# Altium PCB PetWaterDispenser.PcbDoc
Units mm, origin at the board's own origin, x right, y up, seen from the top; angles counter-clockwise.
Board outline 66 x 26 mm, 2 copper layers (Top Layer, Bottom Layer); 20 components, 10 nets, 50 pads, 0 vias.
Unrouted connection lines stored in the file: 1.
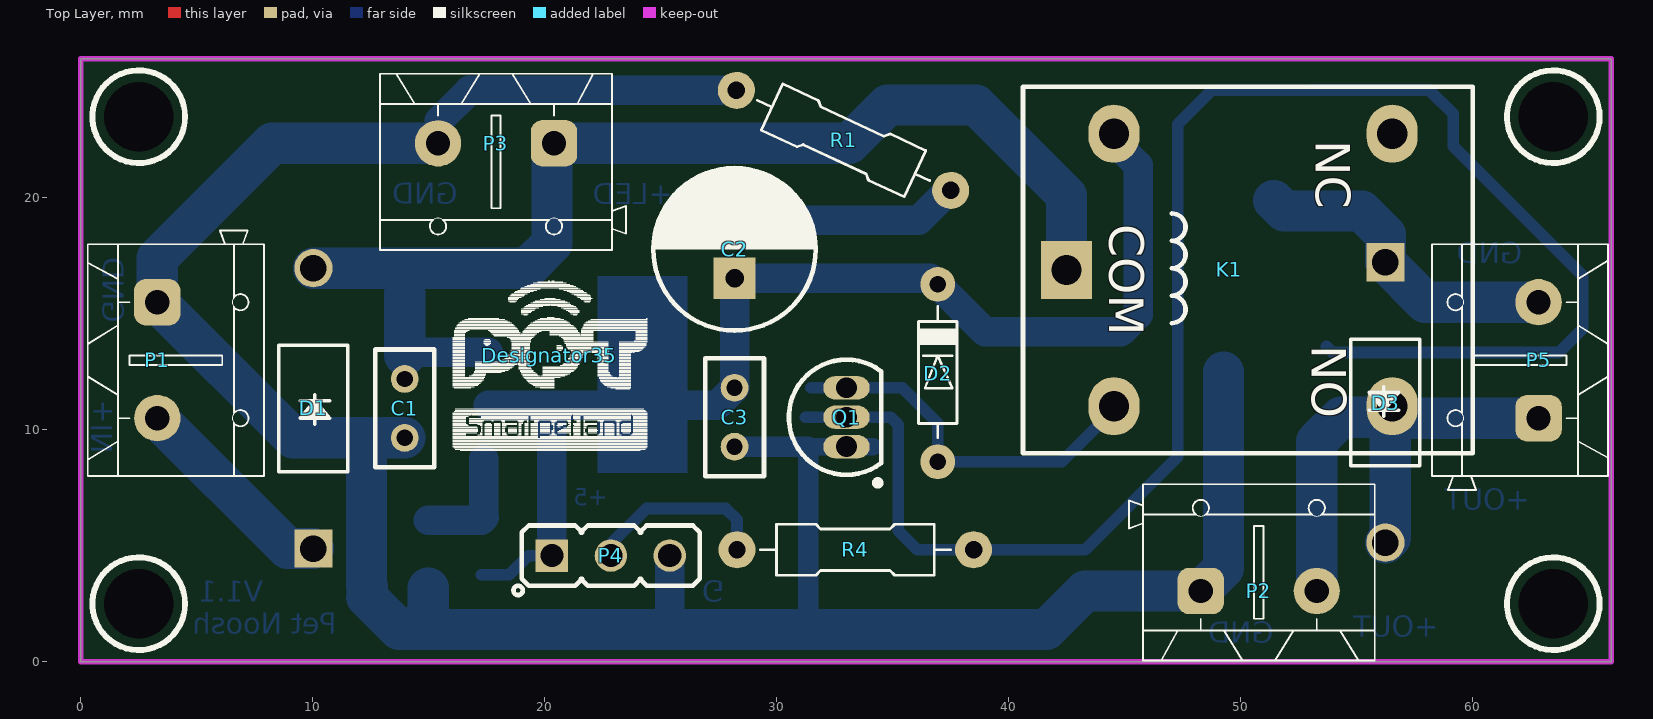
[diagram p0: Top Layer view]
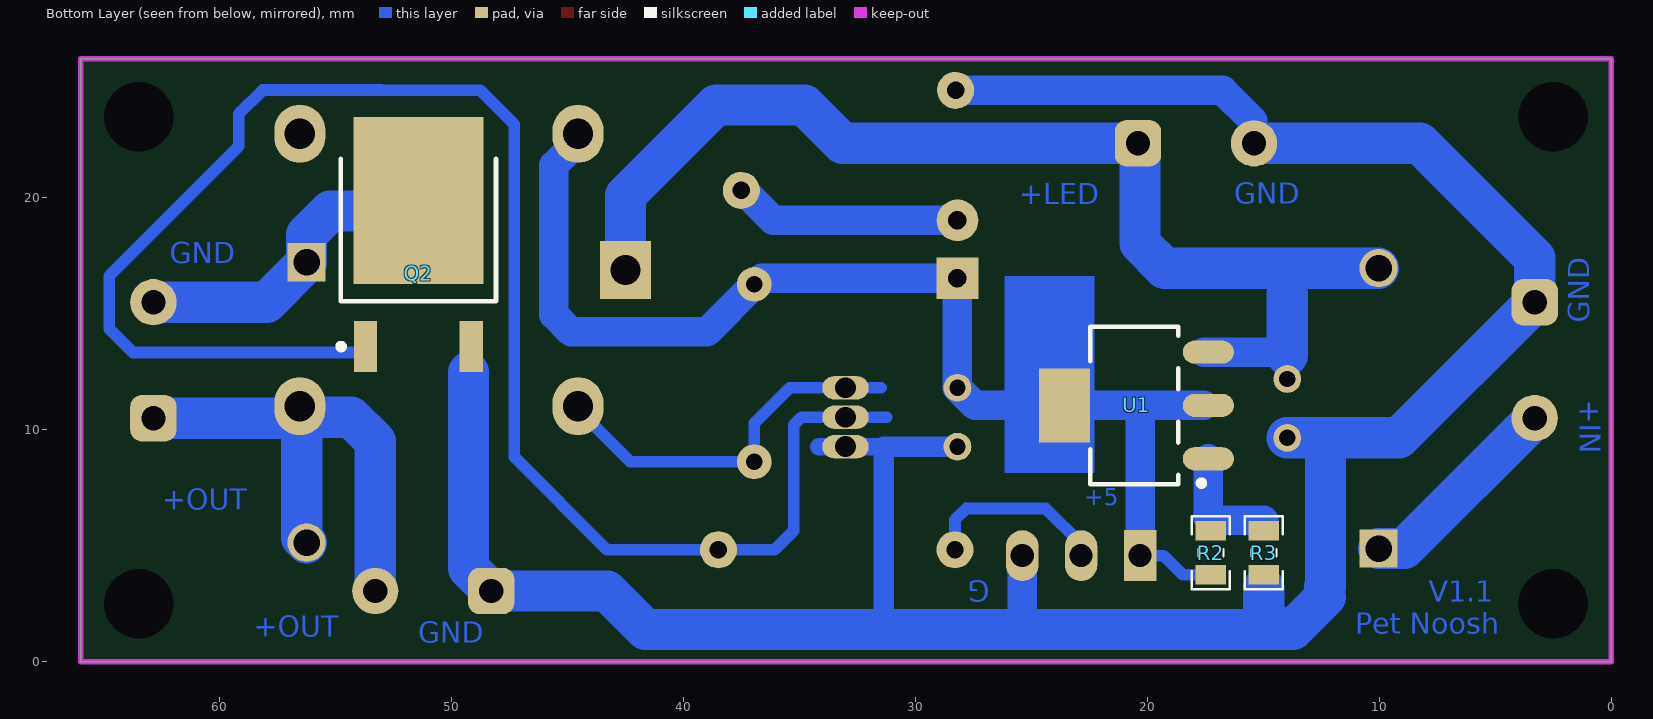
[diagram p1: Bottom Layer view, seen from below]
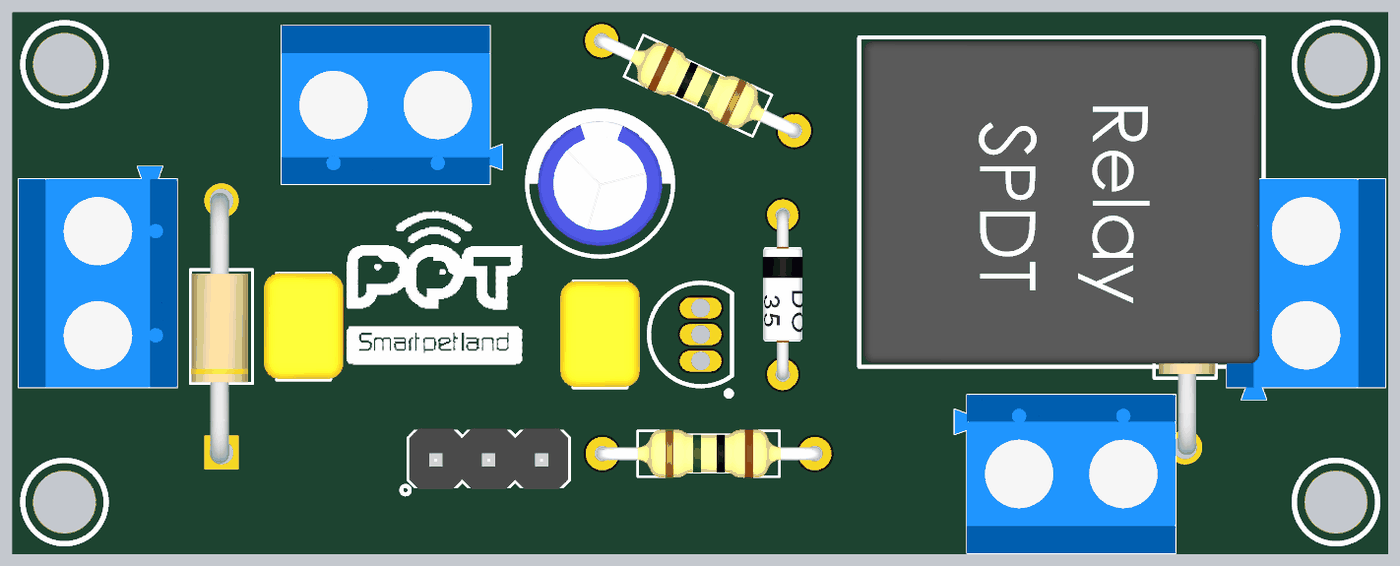
[diagram p2: 3D render of the assembled board from above, using the file's embedded part models]
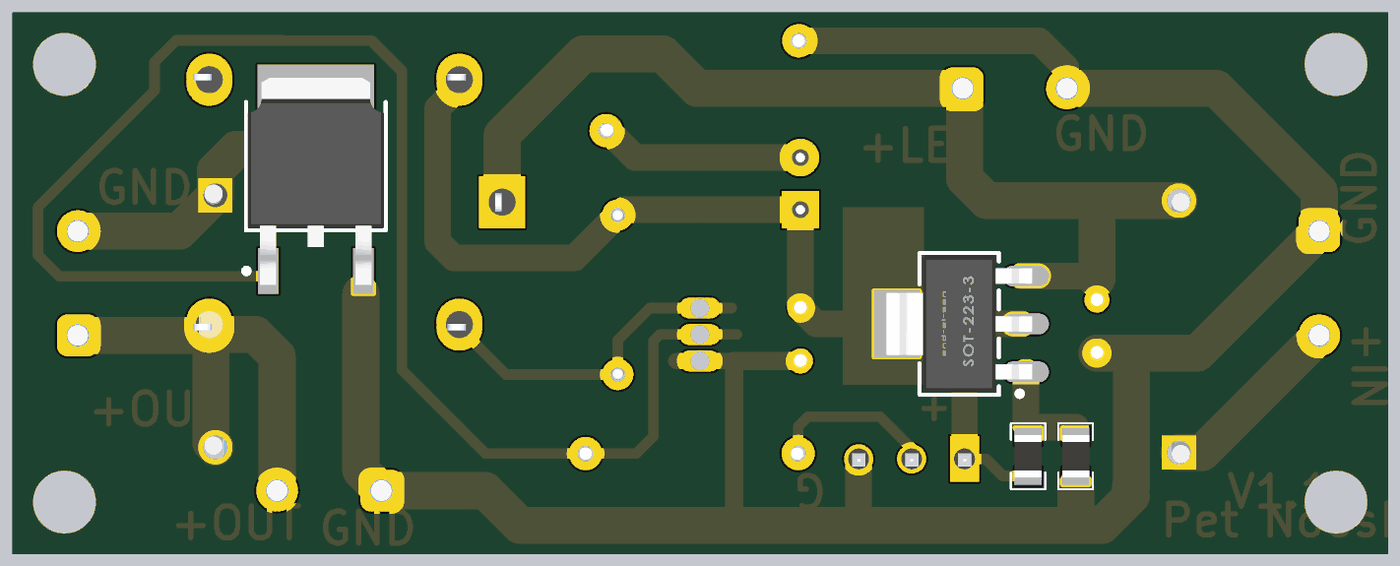
[diagram p3: 3D render of the assembled board from below, using the file's embedded part models]

## Layer stack, top to bottom
Top Solder: solder mask 0.0102, Solder Resist, Dk 3.5
Top Layer: signal copper 0.0356
Dielectric 1: dielectric 0.32, FR-4, Dk 4.8
Bottom Layer: signal copper 0.0356
Bottom Solder: solder mask 0.0102, Solder Resist, Dk 3.5

## Board outline
0,0 0,26 66,26 66,0

## Design rules (kind name [scope] priority, off if disabled: settings)
Clearance [All] p1: gap=0.381 ignorepadtopadclearanceinfootprint=TRUE
ComponentClearance [All] p1: gap=0 collisioncheckmode=3 verticalgap=0.254 showdistances=FALSE
PolygonConnect [All] p1: connectstyle=Relief reliefconductorwidth=0.254 reliefentries=4 polygonreliefangle="90 Angle" airgapwidth=0.254
RoutingVias [All] p1: holewidth=0.711 width=1.27 viastyle="Through Hole" minholewidth=0.711 minwidth=1.27 maxholewidth=0.711 maxwidth=1.27
SolderMaskExpansion [All] p1: expansion=0.102 istentingtop=FALSE
Width [All] p1: maxlimit=12.7 minlimit=0.254 preferedwidth=0.508 minimp=50.000000 maximp=50.000000 favimp=50.000000
29 further rules are at their usual default settings.

## Components (designator, comment, footprint, x,y, rotation, side; value= is the part's Value field where it differs from the comment)
C1 "Cap" CAP_MLCC_RAD_0.1 13.97,10.922 r90 top value=100nF
C2 "Cap2" "Cap electrolitic radial 6x7-2.5" 28.194,17.78 r90 top value=33uF
C3 "Cap" CAP_MLCC_RAD_0.1 28.194,10.541 r90 top value=100nF
D1 "Diode 1N4007" DO-204AL 10.16,10.795 r90 top
D2 "1N4148UR-1" "DO 35" 36.957,12.446 r270 top
D3 "Diode 1N4007" DO-204AL 56.134,11.303 r270 top
Designator35 "Comment" Logo_SmartPetLand 20.193,13.208 r0 top
K1 "" "Relay 18.85x15.35x15.70" 49.53,16.891 r270 top
P1 "ADAPTOR" "KF301 2PIN" 3.302,13 r270 top
P2 "PUMP" "KF301 2PIN" 50.8,3.048 r0 top
P3 "LED" "KF301 2PIN" 17.907,22.352 r180 top
P4 "PIR" HDR_1x3 22.86,4.572 r0 top
P5 "PUMP" "KF301 2PIN" 62.865,13 r90 top
Q1 "2N3904" TO-92A 33.02,10.541 r0 top
Q2 "MTD20N03HL" TO252-3M 51.441,17.989 r90 bottom
R1 "0R" "Axial 0_25 W, 0_4 IN LEAD PITCH" 32.893,22.479 r335 top value=1K
R2 "330" RES0805 17.272,4.699 r270 bottom value=1K
R3 "1K" RES0805 14.986,4.699 r90 bottom
R4 "1K" "Axial 0_25 W, 0_4 IN LEAD PITCH" 33.401,4.826 r180 top
U1 "LM1117IMPX-ADJ/NOPB" SOT223_4 20.574,11.049 r0 bottom

## Footprints (in the part's own frame and the unit in brackets; to place one, negate y for a bottom-side part, rotate by r counter-clockwise, add the part's x,y. Pads: shape width x height; smd on the part's side, far side on the other; paste and mask are expansions set on the pad)
"Axial 0_25 W, 0_4 IN LEAD PITCH" [mm] "Designer Abbas Basereh"
  round 1.6 hole 0.75: 1(5.1,0) 2(-5.1,0)
  silkscreen extent -4.1,-1.1 4.1,1.1, body extent -5.4,-1.16 5.36,1.16, height 3.63
"Cap electrolitic radial 6x7-2.5" [mm] "Cap electrolitic radial 6x7-2.5-Design:Abbas Basereh"
  rect 1.8x1.8 hole 0.8: 1(-1.25,0)
  round 1.8 hole 0.8: 2(1.25,0)
  silkscreen extent -3.5,-3.5 3.6,3.5, body extent -3,-3 3,3, height 7.3
CAP_MLCC_RAD_0.1 [mm]
  round 1.2 hole 0.7: 1(-1.27,0) 2(1.27,0)
  silkscreen extent -2.54,-1.27 2.54,1.27, body extent -2.51,-1.91 2.57,1.91, height 7.36
"DO 35" [mm] "Diode"
  round 1.5 hole 0.7: 1(3.825,0) 2(-3.825,0)
  silkscreen extent -2.88,-0.85 2.8,0.85, body extent -4.1,-0.96 4.08,0.96, height 2.46
DO-204AL [mil]
  rect 65x65 hole 45 mask+0: 1(-233,5)
  round 65 hole 45 mask+0: 2(243,5)
  silkscreen extent -102,-54 112,64, body extent -253,-45 257,62, height 107
HDR_1x3 [mm] "Header /Jumper box-Designer Abbas Basereh"
  rect 1.4x1.4 / inner rect 1.4x1.4 / far side rect 1.4x2.2 hole 1 mask+0.1: 1(-2.54,0)
  round 1.4 / inner round 1.4 / far side oval 1.4x2.2 hole 1 mask+0.1: 2(0,0) 3(2.54,0)
  silkscreen extent -4.2,-1.7 3.84,1.3, body extent -3.82,-1.46 3.8,1.46, height 8.61
"KF301 2PIN" [mm] "Designer Abbas Basereh"
  rrect50% 2x2 hole 1.05: 1(-2.5,0)
  round 2 hole 1.05: 2(2.5,0)
  silkscreen extent -5.6,-3 5,4.6, body extent -5.6,-3 5,4.6, height 10
Logo_SmartPetLand [mm]
  silkscreen extent -4.14,-4.09 4.24,3.23
"Relay 18.85x15.35x15.70" [mm] "DESIGNER ABBAS BASEREH"
  rect 2.5x2.2 hole 1.3: 1(0,-7.025)
  oval 2.5x2.2 hole 1.3: 2(-5.875,7.025) 3(5.875,7.025) 4(-5.875,-4.975) 5(5.875,-4.975)
  silkscreen extent -7.9,-8.9 7.9,10.5, body extent -7.75,-8.7 7.75,10.3, height 15.6
RES0805 [mm] "Chip Resistor, 2-Leads, Body 2/00x1/25mm, IPC Medium Density DESIGNER:ABBAS BASEREH"
  rect 0.85x1.3 smd: 1(-0.95,0) 2(0.95,0)
  silkscreen extent -1.58,-0.82 1.58,0.82, body extent -1.02,-0.65 1.03,0.65, height 0.5
SOT223_4 [mm] "SOT223, 4-Leads, Body 6.5x3.5mm, Pitch 2.30mm-Designer Abbas Basereh"
  oval 2.2x1 smd: 1(-3.2,2.3) 2(-3.2,0) 3(-3.2,-2.3)
  rect 2.2x3.2 smd: 4(3,0)
  Top Layer pour cut-out: -1.7,3.556 1.7,3.556 1.7,-3.556 -1.7,-3.556
  silkscreen extent -3.02,-3.4 1.9,3.47, body extent -3.5,-3.25 3.5,3.25, height 1.7
TO252-3M [mm] "D-PAK, 3-Pads, Body 6.2x6.7mm (max), IPC Low Density"
  rect 2.2x1 smd: 1(-4.4,2.28) 3(-4.4,-2.28)
  rect 7.2x5.6 smd: 4(1.9,0)
  silkscreen extent -4.52,-3.35 3.7,3.45, body extent -5.06,-3.27 4.88,3.27, height 2.39
TO-92A [mm] "TO, Flat Index; 3 In-Line, Axial Leads; Body Dia. 4.5mm; Leads 0.51 x 0.48 mm (max)"
  oval 2x1 hole 0.9: 1(0,-1.27) 2(0,0) 3(0,1.27)
  silkscreen extent -2.48,-2.95 1.5,2.48, body extent -2.48,-2.5 1.5,2.5, height 6.86

## Part data
C1 C2 C3: "Capacitor", Publisher="Altium Limited"
  C1 C3: LatestRevisionDate=17-Jul-2002, LatestRevisionNote="Re-released for DXP Platform.", PackageDescription="Radial Cap, Thru-Hole; 2 Leads; 0.3 in Pin Spacing", PackageReference=RAD-0.3, Published=8-Jun-2000
  C2: PackageDescription="Capacitor; 2 Leads", PackageReference=CAPR5-4X5, Published=23-Sep-2002
D1 D3: "1 Amp General Purpose Rectifier", Code_JEDEC=DO-204-AL, ComponentLink1Description="Manufacturer Link", ComponentLink1URL=http://www.fairchildsemi.com/, ComponentLink2Description=Datasheet, ComponentLink2URL=http://www.fairchildsemi.com/ds/1N%2F1N4001.pdf, DatasheetVersion=1998, LatestRevisionDate=17-Jul-2002, LatestRevisionNote="Re-released for DXP Platform.", PackageDescription="Diode, Axial; Body 5.2 x 2.7 mm (LxDia. max), Lead Dia. 0.86 mm (max)", PackageReference=DO-41, PackageVersion=Aug-1999, Published=8-Jun-2000, Publisher="Altium Limited"
D2: "DIODE GEN PURP 75V 200MA DO213AA", ComponentLink1Description="Manufacturer Link", ComponentLink1URL=http://www.digikey.com/product-detail/en/microsemi-corporation/1N4148UR-1/1N4148UR-1-ND/4377991, ComponentLink2Description=Datasheet, PackageDescription="DIODE GEN PURP 75V 200MA DO213AA", PackageReference=DO-213AA&SOD-80, PackageVersion=2017-1-12, PART.NO=1N4148UR-1, Published=2017-1-12, Publisher="Abbas Basereh"
K1: library part Relay_SPDT, "Single-Pole Dual-Throw Relay", ComponentLink1Description=Datasheet, Designer="Abbas Basereh", Mounting Technology=Through-Hole, Pin Count=0, Update Date=2017-3-1
P1 P2 P3 P5: library part "Header 2", "Header, 2-Pin", LatestRevisionDate=17-Jul-2002, LatestRevisionNote="Re-released for DXP Platform.", Publisher="Altium Limited"
P4: library part "Header 3", "Header, 3-Pin", LatestRevisionDate=17-Jul-2002, LatestRevisionNote="Re-released for DXP Platform.", Publisher="Altium Limited"
Q1: "NPN General Purpose Amplifier", ComponentLink1Description="Manufacturer Link", ComponentLink1URL=http://www.fairchildsemi.com/, ComponentLink2Description=Datasheet, ComponentLink2URL=http://www.fairchildsemi.com/ds/2N%2F2N3904.pdf, DatasheetVersion=1997, LatestRevisionDate=15-Jan-2003, LatestRevisionNote="PCB Footprint 'BCY-W3/D4.7' replaced", PackageDescription="TO, Flat Index; 3 In-Line, Axial Leads; Body Dia. 4.5mm; Leads 0.51 x 0.48 mm (max)", PackageReference=TO-92A, PackageVersion=Sep-1998, Published=8-Jun-2000, Publisher="Altium Limited"
Q2: library part IRLR024N, "HEXFET Power MOSFET", Code_JEDEC=TO-252-AA, ComponentLink1Description="Manufacturer Link", ComponentLink1URL=http://www.irf.com/, ComponentLink2Description=Datasheet, ComponentLink2URL=http://www.irf.com/product-info/datasheets/data/irlr024n.pdf, LatestRevisionDate=20-Nov-2009, LatestRevisionNote="IPC-7351 Footprint Added.", Note="Pin 2 is trimmed and is electrically connected to Drain.", PackageDescription="3-Pin HEXFET Package 2.28 mm Pitch, 9.9 mm Lead Span", PackageReference=TO-252AA, PackageVersion=Feb-2003, Published=8-Jun-2000, Publisher="Altium Limited"
R1 R2 R3 R4: library part Res1, "Resistor", LatestRevisionDate=17-Jul-2002, LatestRevisionNote="Re-released for DXP Platform.", PackageDescription="Axial Device, Thru-Hole; 2 Leads; 0.3 in Pin Spacing", PackageReference=AXIAL-0.3, Published=8-Jun-2000, Publisher="Altium Limited"
U1: "800mA Low-Dropout Linear Regulator, 4-pin SOT-223, Pb-Free", Manufacturer="National Semiconductor", PackageTopMarking=XYTT*N03B, PowerWise=N, Supplier Part Number 1=LM1117IMPX-ADJ-ND, Code_IPC=SOT223-4, Code_JEDEC=TO-261-AA, ComponentLink1Description="LM1117 Datasheet", ComponentLink1URL=http://www.national.com/ds/LM/LM1117.pdf, ComponentLink2Description="LM1117 Web Page", ComponentLink2URL=http://www.national.com/pf/LM/LM1117.html, ComponentLink3Description="MP04A Package Page", ComponentLink3URL=http://www.national.com/packaging/folders/mp04a.html, CompType="LDO IC", DatasheetVersion=Apr-2006, PackageDescription="Molded SOT-223, 6.50 x 3.56 x 1.6mm Body, 4 Lead, 2.3mm Pitch", PackageReference=MP04A, PackageVersion="revB, Apr-2003", PartNumber=LM1117IMPX-ADJ/NOPB, PinCount=4, Published=1-Mar-2010, Publisher="Altium Limited", RoHS=Y, Supplier 1=Digi-Key

## Free pads (board coordinates)
  round 1.524 hole 3: 2(2.5,2.5) 2(2.5,23.5) 2(63.5,2.5) 2(63.5,23.5)

## Nets (pads, with @x,y where several pads share a name; then routed paths per layer and width w, separated by ;. In a path a pad name is that pad's centre, name@x,y a point inside that pad or via, vN(x,y) a via of type N, cw(c..) or ccw(c..) an arc to the next point about the centre after c; other vN are vias at no path point)
+5V: C2.1 C3.2 D2.2 K1.4 P4.1 R2.2 U1.2 U1.4 | length 52.5
  Bottom Layer w0.508: R2.2 18.481,3.749 19.304,4.572 P4.1
  Bottom Layer w1.27: U1.2@17.58,11.049 20.193,11.049 ; P4.1 P4.1@20.385,4.637 ; P4.1@20.32,4.637 20.32,10.922 20.193,11.049 ; K1.4 44.555,22.445 45.593,21.407 45.593,14.968 44.849,14.224 39.004,14.224 D2.2 36.895,16.271 36.636,16.53 C2.1 C3.2 27.432,11.049 U1.4 20.193,11.049
+9V: C1.2 D1.2 K1.1 P3.1 U1.3 | length 49
  Bottom Layer w1.27: 13.97,13.208 14.111,13.349 U1.3@17.58,13.349
  Bottom Layer w1.778: D1.2 19.253,16.967 20.32,18.034 P3.1@20.32,22.352 ; 13.97,13.208 13.97,15.875 ; P3.1 33.147,22.352 34.798,24.003 38.608,24.003 42.505,20.106 K1.1
GND: C1.1 C2.2 C3.1 P1.1 P2.1 P3.2 P4.3 Q1.1 Q2.3 R1.1 R1.2 R3.1 | length 124.8
  Bottom Layer w0.762: 31.369,9.271 34.163,9.271
  Bottom Layer w0.889: C3.1 31.369,9.271 31.369,2.202
  Bottom Layer w1.27: P3.2@15.46,22.352 15.46,23.334 16.76,24.634 R1.2 ; 25.4,1.384 P4.3 ; C2.2 36.132,19.03 37.426,20.324 R1.1
  Bottom Layer w1.778: 12.319,2.794 13.729,1.384 14.351,1.384 ; 12.319,9.271 12.319,3.244 12.365,3.244 ; C1.1 9.15,9.652 P1.1 3.302,17.399 8.255,22.352 P3.2 ; 14.986,3.175 14.986,2.019 14.351,1.384 ; Q2.3@49.282,12.491 49.282,4.03 P2.1 43.307,3.048 41.643,1.384 25.4,1.384 14.351,1.384
NetD1_1: D1.1 P1.2 | length 9.1
  Bottom Layer w1.778: P1.2 8.925,4.877 D1.1
NetD2_1: D2.1 K1.5 Q1.3 | length 16.4
  Bottom Layer w0.508: 31.496,11.811 Q1.3 35.433,11.811 36.957,10.287 D2.1 42.31,8.621 44.555,10.866 K1.5
NetD3_1: D3.1 P5.2 Q2.4 | length 13.9
  Bottom Layer w1.778: Q2.4 51.899,19.431 55.245,19.431 56.261,18.415 D3.1 57.982,15.5 P5.2
NetD3_2: D3.2 K1.3 P2.2 P5.1 | length 22.9
  Bottom Layer w1.778: P2.2 53.3,9.499 54.342,10.541 56.08,10.541 56.324,10.785 56.36,10.785 K1.3@56.474,10.899 ; D3.2 56.474,5.344 K1.3@56.474,10.899 ; P5.1 57.035,10.5 K1.3@56.555,10.98 ; K1.3@56.474,10.899 K1.3@56.555,10.98 ; K1.3@56.474,10.899 56.474,10.935 K1.3 K1.3@56.555,10.98
NetQ1_2: Q1.2 Q2.1 R4.2 | length 73.2
  Bottom Layer w0.508: 31.242,10.541 Q1.2 34.925,10.541 35.248,10.218 35.248,5.646 36.068,4.826 R4.2 43.307,4.826 47.307,8.826 47.307,23.177 48.768,24.638 53.014,24.638 53.027,24.651 58.153,24.651 59.182,23.622 59.182,22.225 64.77,16.637 64.77,14.351 63.754,13.335 53.967,13.335 53.721,13.581 Q2.1
NetR2_1: R2.1 R3.2 U1.1 | length 5
  Bottom Layer w1.27: 14.986,6.096 17.272,6.096 17.399,6.223 17.374,6.248 U1.1
Trigger: P4.2 R4.1 | length 8.1
  Bottom Layer w0.508: P4.2 22.86,5.08 24.384,6.604 27.813,6.604 28.301,6.116 R4.1
pads on no net: K1.2

## Keep-outs
Keep-Out Layer:
  the board outline again, w0.229

## Other copper
Bottom Layer:
  rectangle net +5V: 22.274,8.128 26.162,16.637
  text "GND" at 16.256,19.447 h1.52
  text "+LED" at 25.527,19.431 h1.52
  text "GND" at 62.156,16.869 h1.52
  text "GND" at 0.651,14.605 h1.52 r270
  text "+IN" at 1.651,11.303 h1.52 r90
  text "+5" at 22.733,6.491 h1.27
  text "+OUT" at 62.484,6.239 h1.52
  text "G" at 26.797,3.794 h1.52 r180
  text "V1.1" at 7.873,2.286 h1.52
  text "Pet Noosh" at 11.049,0.905 h1.52
  text "+OUT" at 58.547,0.778 h1.52
  text "GND" at 51.435,0.524 h1.52

## Silkscreen, mask and mechanical layers (free items; w line width, h text height)
Top Overlay:
  circle w0.254: c63.5,23.5 r2
  circle w0.254: c2.5,23.5 r2
  circle w0.254: c2.5,2.5 r2
  circle w0.254: c63.5,2.5 r2

## Dimensions
66,0 to 0,0 on Mechanical 15
66,26 to 66,0 on Mechanical 15

## Text inside footprints (layer, text, board x,y; h text height)
K1: Top Overlay "COM" at 44.348,18.872 h1.5 r270; Top Overlay "NO" at 53.086,13.64 h1.5 r270; Top Overlay "NC" at 53.264,22.479 h1.5 r270